# EAGLE board board_2mm_grid (EAGLE 7.2.0)
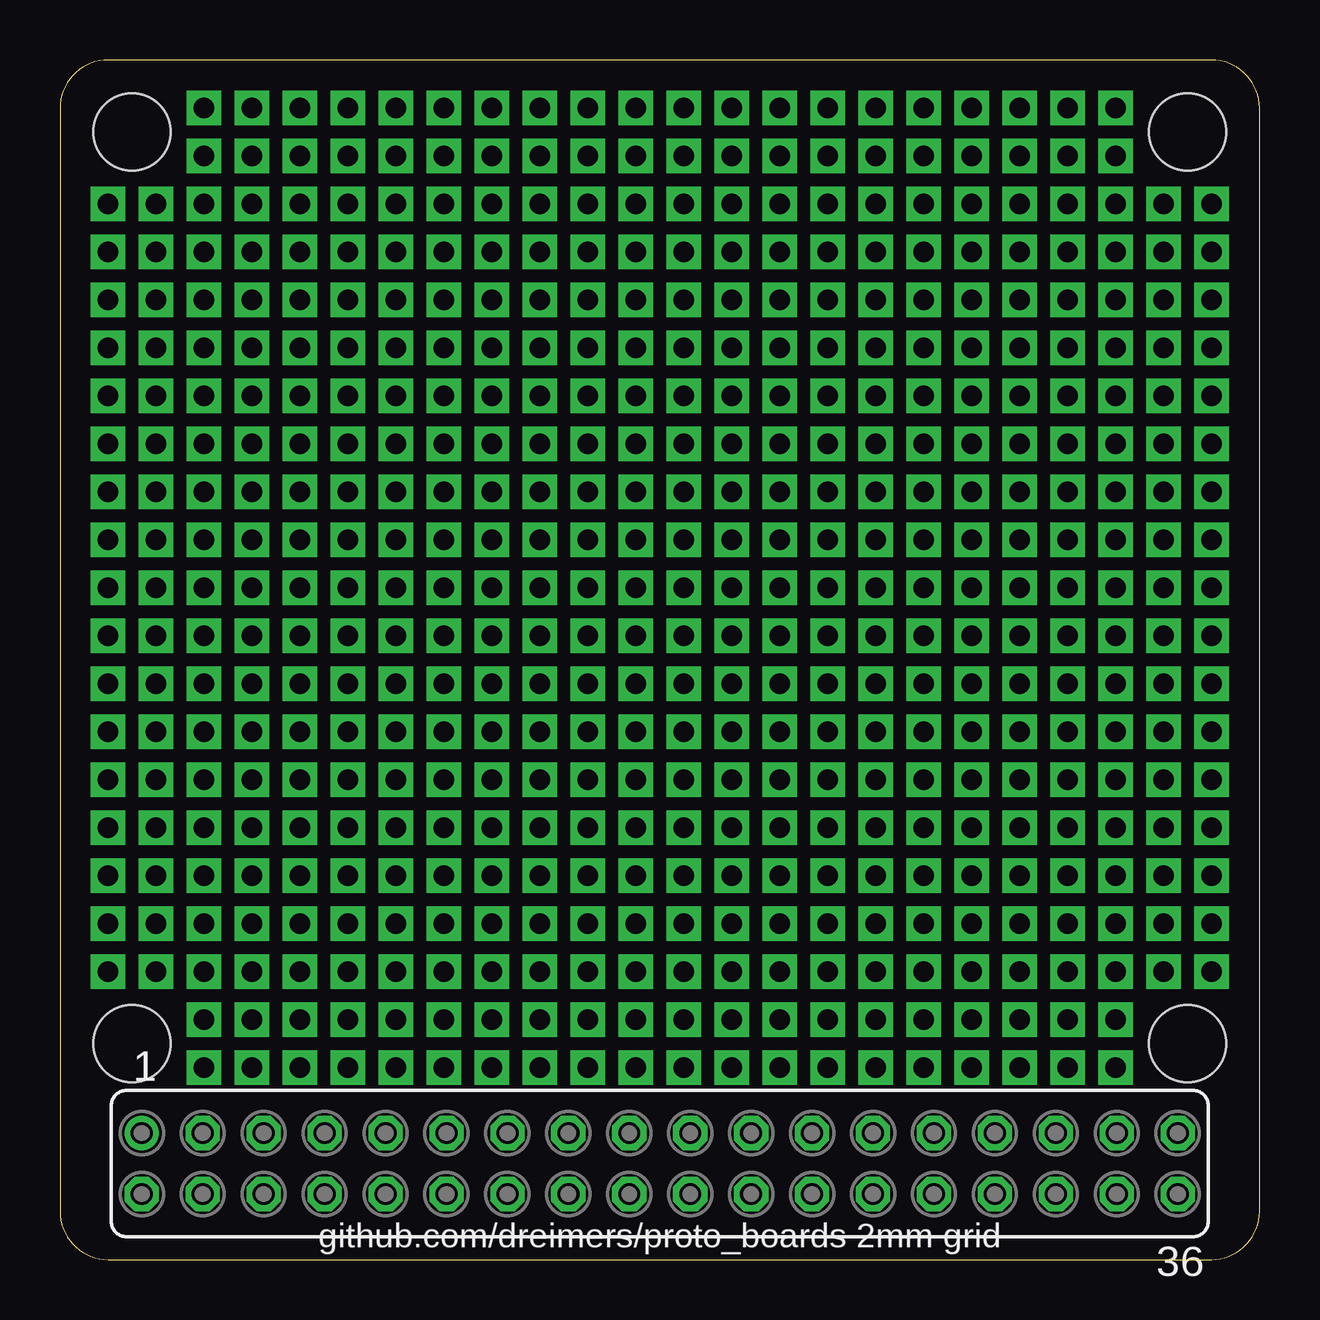
[diagram p0: board, top side]

Size 50 x 50 mm. Coordinates in mm from the lower left corner, seen from the top.
Outline: 0,48 0,2 arc90 2,0 48,0 arc90 50,2 50,48 arc90 48,50 2,50 arc90 0,48
Copper layers (1*16): Top 0.035mm / dielectric 1.5mm / Bottom 0.035mm
Design rules "ITEADstudio_DRC": minimum track width 6mil, minimum drill 12mil, track to track 6mil, track to pad 6mil, pad to pad 6mil, via to via 6mil, smd to smd 0mil, copper to edge 10mil, drill to drill 10mil, minimum pad ring 10mil, minimum via ring 6mil, stop-mask expansion 2mil, vias tented up to drill 100mil, thermal gap 10mil
Holes 3.2 mm at 3,9 47,9 3,47 47,47

## Footprints (pad centres in the part's own frame; a part is rotated, then mirrored left to right if it is on the bottom)
FE18-2 = drill 0.914: 1 -21.59,1.27 | drill 0.914 octagon: 2 -21.59,-1.27; 3 -19.05,1.27; 4 -19.05,-1.27; 5 -16.51,1.27; 6 -16.51,-1.27; 7 -13.97,1.27; 8 -13.97,-1.27; 9 -11.43,1.27; 10 -11.43,-1.27; 11 -8.89,1.27; 12 -8.89,-1.27; 13 -6.35,1.27; 14 -6.35,-1.27; 15 -3.81,1.27; 16 -3.81,-1.27; 17 -1.27,1.27; 18 -1.27,-1.27; 19 1.27,1.27; 20 1.27,-1.27; 21 3.81,1.27; 22 3.81,-1.27; 23 6.35,1.27; 24 6.35,-1.27; 25 8.89,1.27; 26 8.89,-1.27; 27 11.43,1.27; 28 11.43,-1.27; 29 13.97,1.27; 30 13.97,-1.27; 31 16.51,1.27; 32 16.51,-1.27; 33 19.05,1.27; 34 19.05,-1.27; 35 21.59,1.27; 36 21.59,-1.27

## Placement (x,y rotation side)
E$1  [FE18-2]  25,4 0 top

## Library data of the parts
E$1 = con-lsta

## Tracks (layer width: path | path; a pad name or v marks a point on that pad's centre or on a via)
S$3  (via drill 0.85 pad 1.42)
  other vias: 6,8
S$4  (via drill 0.85 pad 1.42)
  other vias: 8,8
S$5  (via drill 0.85 pad 1.42)
  other vias: 10,8
S$6  (via drill 0.85 pad 1.42)
  other vias: 12,8
S$7  (via drill 0.85 pad 1.42)
  other vias: 14,8
S$8  (via drill 0.85 pad 1.42)
  other vias: 16,8
S$9  (via drill 0.85 pad 1.42)
  other vias: 18,8
S$10  (via drill 0.85 pad 1.42)
  other vias: 20,8
S$11  (via drill 0.85 pad 1.42)
  other vias: 22,8
S$12  (via drill 0.85 pad 1.42)
  other vias: 24,8
S$13  (via drill 0.85 pad 1.42)
  other vias: 26,8
S$14  (via drill 0.85 pad 1.42)
  other vias: 28,8
S$15  (via drill 0.85 pad 1.42)
  other vias: 30,8
S$16  (via drill 0.85 pad 1.42)
  other vias: 32,8
S$17  (via drill 0.85 pad 1.42)
  other vias: 34,8
S$18  (via drill 0.85 pad 1.42)
  other vias: 36,8
S$19  (via drill 0.85 pad 1.42)
  other vias: 38,8
S$20  (via drill 0.85 pad 1.42)
  other vias: 40,8
S$21  (via drill 0.85 pad 1.42)
  other vias: 42,8
S$22  (via drill 0.85 pad 1.42)
  other vias: 44,8
S$27  (via drill 0.85 pad 1.42)
  other vias: 6,10
S$28  (via drill 0.85 pad 1.42)
  other vias: 8,10
S$29  (via drill 0.85 pad 1.42)
  other vias: 10,10
S$30  (via drill 0.85 pad 1.42)
  other vias: 12,10
S$31  (via drill 0.85 pad 1.42)
  other vias: 14,10
S$32  (via drill 0.85 pad 1.42)
  other vias: 16,10
S$33  (via drill 0.85 pad 1.42)
  other vias: 18,10
S$34  (via drill 0.85 pad 1.42)
  other vias: 20,10
S$35  (via drill 0.85 pad 1.42)
  other vias: 22,10
S$36  (via drill 0.85 pad 1.42)
  other vias: 24,10
S$37  (via drill 0.85 pad 1.42)
  other vias: 26,10
S$38  (via drill 0.85 pad 1.42)
  other vias: 28,10
S$39  (via drill 0.85 pad 1.42)
  other vias: 30,10
S$40  (via drill 0.85 pad 1.42)
  other vias: 32,10
S$41  (via drill 0.85 pad 1.42)
  other vias: 34,10
S$42  (via drill 0.85 pad 1.42)
  other vias: 36,10
S$43  (via drill 0.85 pad 1.42)
  other vias: 38,10
S$44  (via drill 0.85 pad 1.42)
  other vias: 40,10
S$45  (via drill 0.85 pad 1.42)
  other vias: 42,10
S$46  (via drill 0.85 pad 1.42)
  other vias: 44,10
S$49  (via drill 0.85 pad 1.42)
  other vias: 2,12
S$50  (via drill 0.85 pad 1.42)
  other vias: 4,12
S$51  (via drill 0.85 pad 1.42)
  other vias: 6,12
S$52  (via drill 0.85 pad 1.42)
  other vias: 8,12
S$53  (via drill 0.85 pad 1.42)
  other vias: 10,12
S$54  (via drill 0.85 pad 1.42)
  other vias: 12,12
S$55  (via drill 0.85 pad 1.42)
  other vias: 14,12
S$56  (via drill 0.85 pad 1.42)
  other vias: 16,12
S$57  (via drill 0.85 pad 1.42)
  other vias: 18,12
S$58  (via drill 0.85 pad 1.42)
  other vias: 20,12
S$59  (via drill 0.85 pad 1.42)
  other vias: 22,12
S$60  (via drill 0.85 pad 1.42)
  other vias: 24,12
S$61  (via drill 0.85 pad 1.42)
  other vias: 26,12
S$62  (via drill 0.85 pad 1.42)
  other vias: 28,12
S$63  (via drill 0.85 pad 1.42)
  other vias: 30,12
S$64  (via drill 0.85 pad 1.42)
  other vias: 32,12
S$65  (via drill 0.85 pad 1.42)
  other vias: 34,12
S$66  (via drill 0.85 pad 1.42)
  other vias: 36,12
S$67  (via drill 0.85 pad 1.42)
  other vias: 38,12
S$68  (via drill 0.85 pad 1.42)
  other vias: 40,12
S$69  (via drill 0.85 pad 1.42)
  other vias: 42,12
S$70  (via drill 0.85 pad 1.42)
  other vias: 44,12
S$71  (via drill 0.85 pad 1.42)
  other vias: 46,12
S$72  (via drill 0.85 pad 1.42)
  other vias: 48,12
S$73  (via drill 0.85 pad 1.42)
  other vias: 2,14
S$74  (via drill 0.85 pad 1.42)
  other vias: 4,14
S$75  (via drill 0.85 pad 1.42)
  other vias: 6,14
S$76  (via drill 0.85 pad 1.42)
  other vias: 8,14
S$77  (via drill 0.85 pad 1.42)
  other vias: 10,14
S$78  (via drill 0.85 pad 1.42)
  other vias: 12,14
S$79  (via drill 0.85 pad 1.42)
  other vias: 14,14
S$80  (via drill 0.85 pad 1.42)
  other vias: 16,14
S$81  (via drill 0.85 pad 1.42)
  other vias: 18,14
S$82  (via drill 0.85 pad 1.42)
  other vias: 20,14
S$83  (via drill 0.85 pad 1.42)
  other vias: 22,14
S$84  (via drill 0.85 pad 1.42)
  other vias: 24,14
S$85  (via drill 0.85 pad 1.42)
  other vias: 26,14
S$86  (via drill 0.85 pad 1.42)
  other vias: 28,14
S$87  (via drill 0.85 pad 1.42)
  other vias: 30,14
S$88  (via drill 0.85 pad 1.42)
  other vias: 32,14
S$89  (via drill 0.85 pad 1.42)
  other vias: 34,14
S$90  (via drill 0.85 pad 1.42)
  other vias: 36,14
S$91  (via drill 0.85 pad 1.42)
  other vias: 38,14
S$92  (via drill 0.85 pad 1.42)
  other vias: 40,14
S$93  (via drill 0.85 pad 1.42)
  other vias: 42,14
S$94  (via drill 0.85 pad 1.42)
  other vias: 44,14
S$95  (via drill 0.85 pad 1.42)
  other vias: 46,14
S$96  (via drill 0.85 pad 1.42)
  other vias: 48,14
S$97  (via drill 0.85 pad 1.42)
  other vias: 2,16
S$98  (via drill 0.85 pad 1.42)
  other vias: 4,16
S$99  (via drill 0.85 pad 1.42)
  other vias: 6,16
S$100  (via drill 0.85 pad 1.42)
  other vias: 8,16
S$101  (via drill 0.85 pad 1.42)
  other vias: 10,16
S$102  (via drill 0.85 pad 1.42)
  other vias: 12,16
S$103  (via drill 0.85 pad 1.42)
  other vias: 14,16
S$104  (via drill 0.85 pad 1.42)
  other vias: 16,16
S$105  (via drill 0.85 pad 1.42)
  other vias: 18,16
S$106  (via drill 0.85 pad 1.42)
  other vias: 20,16
S$107  (via drill 0.85 pad 1.42)
  other vias: 22,16
S$108  (via drill 0.85 pad 1.42)
  other vias: 24,16
S$109  (via drill 0.85 pad 1.42)
  other vias: 26,16
S$110  (via drill 0.85 pad 1.42)
  other vias: 28,16
S$111  (via drill 0.85 pad 1.42)
  other vias: 30,16
S$112  (via drill 0.85 pad 1.42)
  other vias: 32,16
S$113  (via drill 0.85 pad 1.42)
  other vias: 34,16
S$114  (via drill 0.85 pad 1.42)
  other vias: 36,16
S$115  (via drill 0.85 pad 1.42)
  other vias: 38,16
S$116  (via drill 0.85 pad 1.42)
  other vias: 40,16
S$117  (via drill 0.85 pad 1.42)
  other vias: 42,16
S$118  (via drill 0.85 pad 1.42)
  other vias: 44,16
S$119  (via drill 0.85 pad 1.42)
  other vias: 46,16
S$120  (via drill 0.85 pad 1.42)
  other vias: 48,16
S$121  (via drill 0.85 pad 1.42)
  other vias: 2,18
S$122  (via drill 0.85 pad 1.42)
  other vias: 4,18
S$123  (via drill 0.85 pad 1.42)
  other vias: 6,18
S$124  (via drill 0.85 pad 1.42)
  other vias: 8,18
S$125  (via drill 0.85 pad 1.42)
  other vias: 10,18
S$126  (via drill 0.85 pad 1.42)
  other vias: 12,18
S$127  (via drill 0.85 pad 1.42)
  other vias: 14,18
S$128  (via drill 0.85 pad 1.42)
  other vias: 16,18
S$129  (via drill 0.85 pad 1.42)
  other vias: 18,18
S$130  (via drill 0.85 pad 1.42)
  other vias: 20,18
S$131  (via drill 0.85 pad 1.42)
  other vias: 22,18
S$132  (via drill 0.85 pad 1.42)
  other vias: 24,18
S$133  (via drill 0.85 pad 1.42)
  other vias: 26,18
S$134  (via drill 0.85 pad 1.42)
  other vias: 28,18
S$135  (via drill 0.85 pad 1.42)
  other vias: 30,18
S$136  (via drill 0.85 pad 1.42)
  other vias: 32,18
S$137  (via drill 0.85 pad 1.42)
  other vias: 34,18
S$138  (via drill 0.85 pad 1.42)
  other vias: 36,18
S$139  (via drill 0.85 pad 1.42)
  other vias: 38,18
S$140  (via drill 0.85 pad 1.42)
  other vias: 40,18
S$141  (via drill 0.85 pad 1.42)
  other vias: 42,18
S$142  (via drill 0.85 pad 1.42)
  other vias: 44,18
S$143  (via drill 0.85 pad 1.42)
  other vias: 46,18
S$144  (via drill 0.85 pad 1.42)
  other vias: 48,18
S$145  (via drill 0.85 pad 1.42)
  other vias: 2,20
S$146  (via drill 0.85 pad 1.42)
  other vias: 4,20
S$147  (via drill 0.85 pad 1.42)
  other vias: 6,20
S$148  (via drill 0.85 pad 1.42)
  other vias: 8,20
S$149  (via drill 0.85 pad 1.42)
  other vias: 10,20
S$150  (via drill 0.85 pad 1.42)
  other vias: 12,20
S$151  (via drill 0.85 pad 1.42)
  other vias: 14,20
S$152  (via drill 0.85 pad 1.42)
  other vias: 16,20
S$153  (via drill 0.85 pad 1.42)
  other vias: 18,20
S$154  (via drill 0.85 pad 1.42)
  other vias: 20,20
S$155  (via drill 0.85 pad 1.42)
  other vias: 22,20
S$156  (via drill 0.85 pad 1.42)
  other vias: 24,20
S$157  (via drill 0.85 pad 1.42)
  other vias: 26,20
S$158  (via drill 0.85 pad 1.42)
  other vias: 28,20
S$159  (via drill 0.85 pad 1.42)
  other vias: 30,20
S$160  (via drill 0.85 pad 1.42)
  other vias: 32,20
S$161  (via drill 0.85 pad 1.42)
  other vias: 34,20
S$162  (via drill 0.85 pad 1.42)
  other vias: 36,20
S$163  (via drill 0.85 pad 1.42)
  other vias: 38,20
S$164  (via drill 0.85 pad 1.42)
  other vias: 40,20
S$165  (via drill 0.85 pad 1.42)
  other vias: 42,20
S$166  (via drill 0.85 pad 1.42)
  other vias: 44,20
S$167  (via drill 0.85 pad 1.42)
  other vias: 46,20
S$168  (via drill 0.85 pad 1.42)
  other vias: 48,20
S$169  (via drill 0.85 pad 1.42)
  other vias: 2,22
S$170  (via drill 0.85 pad 1.42)
  other vias: 4,22
S$171  (via drill 0.85 pad 1.42)
  other vias: 6,22
S$172  (via drill 0.85 pad 1.42)
  other vias: 8,22
S$173  (via drill 0.85 pad 1.42)
  other vias: 10,22
S$174  (via drill 0.85 pad 1.42)
  other vias: 12,22
S$175  (via drill 0.85 pad 1.42)
  other vias: 14,22
S$176  (via drill 0.85 pad 1.42)
  other vias: 16,22
S$177  (via drill 0.85 pad 1.42)
  other vias: 18,22
S$178  (via drill 0.85 pad 1.42)
  other vias: 20,22
S$179  (via drill 0.85 pad 1.42)
  other vias: 22,22
S$180  (via drill 0.85 pad 1.42)
  other vias: 24,22
S$181  (via drill 0.85 pad 1.42)
  other vias: 26,22
S$182  (via drill 0.85 pad 1.42)
  other vias: 28,22
S$183  (via drill 0.85 pad 1.42)
  other vias: 30,22
S$184  (via drill 0.85 pad 1.42)
  other vias: 32,22
S$185  (via drill 0.85 pad 1.42)
  other vias: 34,22
S$186  (via drill 0.85 pad 1.42)
  other vias: 36,22
S$187  (via drill 0.85 pad 1.42)
  other vias: 38,22
S$188  (via drill 0.85 pad 1.42)
  other vias: 40,22
S$189  (via drill 0.85 pad 1.42)
  other vias: 42,22
S$190  (via drill 0.85 pad 1.42)
  other vias: 44,22
S$191  (via drill 0.85 pad 1.42)
  other vias: 46,22
S$192  (via drill 0.85 pad 1.42)
  other vias: 48,22
S$193  (via drill 0.85 pad 1.42)
  other vias: 2,24
S$194  (via drill 0.85 pad 1.42)
  other vias: 4,24
S$195  (via drill 0.85 pad 1.42)
  other vias: 6,24
S$196  (via drill 0.85 pad 1.42)
  other vias: 8,24
S$197  (via drill 0.85 pad 1.42)
  other vias: 10,24
S$198  (via drill 0.85 pad 1.42)
  other vias: 12,24
S$199  (via drill 0.85 pad 1.42)
  other vias: 14,24
S$200  (via drill 0.85 pad 1.42)
  other vias: 16,24
S$201  (via drill 0.85 pad 1.42)
  other vias: 18,24
S$202  (via drill 0.85 pad 1.42)
  other vias: 20,24
S$203  (via drill 0.85 pad 1.42)
  other vias: 22,24
S$204  (via drill 0.85 pad 1.42)
  other vias: 24,24
S$205  (via drill 0.85 pad 1.42)
  other vias: 26,24
S$206  (via drill 0.85 pad 1.42)
  other vias: 28,24
S$207  (via drill 0.85 pad 1.42)
  other vias: 30,24
S$208  (via drill 0.85 pad 1.42)
  other vias: 32,24
S$209  (via drill 0.85 pad 1.42)
  other vias: 34,24
S$210  (via drill 0.85 pad 1.42)
  other vias: 36,24
S$211  (via drill 0.85 pad 1.42)
  other vias: 38,24
S$212  (via drill 0.85 pad 1.42)
  other vias: 40,24
S$213  (via drill 0.85 pad 1.42)
  other vias: 42,24
S$214  (via drill 0.85 pad 1.42)
  other vias: 44,24
S$215  (via drill 0.85 pad 1.42)
  other vias: 46,24
S$216  (via drill 0.85 pad 1.42)
  other vias: 48,24
S$217  (via drill 0.85 pad 1.42)
  other vias: 2,26
S$218  (via drill 0.85 pad 1.42)
  other vias: 4,26
S$219  (via drill 0.85 pad 1.42)
  other vias: 6,26
S$220  (via drill 0.85 pad 1.42)
  other vias: 8,26
S$221  (via drill 0.85 pad 1.42)
  other vias: 10,26
S$222  (via drill 0.85 pad 1.42)
  other vias: 12,26
S$223  (via drill 0.85 pad 1.42)
  other vias: 14,26
S$224  (via drill 0.85 pad 1.42)
  other vias: 16,26
S$225  (via drill 0.85 pad 1.42)
  other vias: 18,26
S$226  (via drill 0.85 pad 1.42)
  other vias: 20,26
S$227  (via drill 0.85 pad 1.42)
  other vias: 22,26
S$228  (via drill 0.85 pad 1.42)
  other vias: 24,26
S$229  (via drill 0.85 pad 1.42)
  other vias: 26,26
S$230  (via drill 0.85 pad 1.42)
  other vias: 28,26
S$231  (via drill 0.85 pad 1.42)
  other vias: 30,26
S$232  (via drill 0.85 pad 1.42)
  other vias: 32,26
S$233  (via drill 0.85 pad 1.42)
  other vias: 34,26
S$234  (via drill 0.85 pad 1.42)
  other vias: 36,26
S$235  (via drill 0.85 pad 1.42)
  other vias: 38,26
S$236  (via drill 0.85 pad 1.42)
  other vias: 40,26
S$237  (via drill 0.85 pad 1.42)
  other vias: 42,26
S$238  (via drill 0.85 pad 1.42)
  other vias: 44,26
S$239  (via drill 0.85 pad 1.42)
  other vias: 46,26
S$240  (via drill 0.85 pad 1.42)
  other vias: 48,26
S$241  (via drill 0.85 pad 1.42)
  other vias: 2,28
S$242  (via drill 0.85 pad 1.42)
  other vias: 4,28
S$243  (via drill 0.85 pad 1.42)
  other vias: 6,28
S$244  (via drill 0.85 pad 1.42)
  other vias: 8,28
S$245  (via drill 0.85 pad 1.42)
  other vias: 10,28
S$246  (via drill 0.85 pad 1.42)
  other vias: 12,28
S$247  (via drill 0.85 pad 1.42)
  other vias: 14,28
S$248  (via drill 0.85 pad 1.42)
  other vias: 16,28
S$249  (via drill 0.85 pad 1.42)
  other vias: 18,28
S$250  (via drill 0.85 pad 1.42)
  other vias: 20,28
S$251  (via drill 0.85 pad 1.42)
  other vias: 22,28
S$252  (via drill 0.85 pad 1.42)
  other vias: 24,28
S$253  (via drill 0.85 pad 1.42)
  other vias: 26,28
S$254  (via drill 0.85 pad 1.42)
  other vias: 28,28
S$255  (via drill 0.85 pad 1.42)
  other vias: 30,28
S$256  (via drill 0.85 pad 1.42)
  other vias: 32,28
S$257  (via drill 0.85 pad 1.42)
  other vias: 34,28
S$258  (via drill 0.85 pad 1.42)
  other vias: 36,28
S$259  (via drill 0.85 pad 1.42)
  other vias: 38,28
S$260  (via drill 0.85 pad 1.42)
  other vias: 40,28
S$261  (via drill 0.85 pad 1.42)
  other vias: 42,28
S$262  (via drill 0.85 pad 1.42)
  other vias: 44,28
S$263  (via drill 0.85 pad 1.42)
  other vias: 46,28
S$264  (via drill 0.85 pad 1.42)
  other vias: 48,28
S$265  (via drill 0.85 pad 1.42)
  other vias: 2,30
S$266  (via drill 0.85 pad 1.42)
  other vias: 4,30
S$267  (via drill 0.85 pad 1.42)
  other vias: 6,30
S$268  (via drill 0.85 pad 1.42)
  other vias: 8,30
S$269  (via drill 0.85 pad 1.42)
  other vias: 10,30
S$270  (via drill 0.85 pad 1.42)
  other vias: 12,30
S$271  (via drill 0.85 pad 1.42)
  other vias: 14,30
S$272  (via drill 0.85 pad 1.42)
  other vias: 16,30
S$273  (via drill 0.85 pad 1.42)
  other vias: 18,30
S$274  (via drill 0.85 pad 1.42)
  other vias: 20,30
S$275  (via drill 0.85 pad 1.42)
  other vias: 22,30
S$276  (via drill 0.85 pad 1.42)
  other vias: 24,30
S$277  (via drill 0.85 pad 1.42)
  other vias: 26,30
S$278  (via drill 0.85 pad 1.42)
  other vias: 28,30
S$279  (via drill 0.85 pad 1.42)
  other vias: 30,30
S$280  (via drill 0.85 pad 1.42)
  other vias: 32,30
S$281  (via drill 0.85 pad 1.42)
  other vias: 34,30
S$282  (via drill 0.85 pad 1.42)
  other vias: 36,30
S$283  (via drill 0.85 pad 1.42)
  other vias: 38,30
S$284  (via drill 0.85 pad 1.42)
  other vias: 40,30
S$285  (via drill 0.85 pad 1.42)
  other vias: 42,30
S$286  (via drill 0.85 pad 1.42)
  other vias: 44,30
S$287  (via drill 0.85 pad 1.42)
  other vias: 46,30
S$288  (via drill 0.85 pad 1.42)
  other vias: 48,30
S$289  (via drill 0.85 pad 1.42)
  other vias: 2,32
S$290  (via drill 0.85 pad 1.42)
  other vias: 4,32
S$291  (via drill 0.85 pad 1.42)
  other vias: 6,32
S$292  (via drill 0.85 pad 1.42)
  other vias: 8,32
S$293  (via drill 0.85 pad 1.42)
  other vias: 10,32
S$294  (via drill 0.85 pad 1.42)
  other vias: 12,32
S$295  (via drill 0.85 pad 1.42)
  other vias: 14,32
S$296  (via drill 0.85 pad 1.42)
  other vias: 16,32
S$297  (via drill 0.85 pad 1.42)
  other vias: 18,32
S$298  (via drill 0.85 pad 1.42)
  other vias: 20,32
S$299  (via drill 0.85 pad 1.42)
  other vias: 22,32
S$300  (via drill 0.85 pad 1.42)
  other vias: 24,32
S$301  (via drill 0.85 pad 1.42)
  other vias: 26,32
S$302  (via drill 0.85 pad 1.42)
  other vias: 28,32
S$303  (via drill 0.85 pad 1.42)
  other vias: 30,32
S$304  (via drill 0.85 pad 1.42)
  other vias: 32,32
S$305  (via drill 0.85 pad 1.42)
  other vias: 34,32
S$306  (via drill 0.85 pad 1.42)
  other vias: 36,32
S$307  (via drill 0.85 pad 1.42)
  other vias: 38,32
S$308  (via drill 0.85 pad 1.42)
  other vias: 40,32
S$309  (via drill 0.85 pad 1.42)
  other vias: 42,32
S$310  (via drill 0.85 pad 1.42)
  other vias: 44,32
S$311  (via drill 0.85 pad 1.42)
  other vias: 46,32
S$312  (via drill 0.85 pad 1.42)
  other vias: 48,32
S$313  (via drill 0.85 pad 1.42)
  other vias: 2,34
S$314  (via drill 0.85 pad 1.42)
  other vias: 4,34
S$315  (via drill 0.85 pad 1.42)
  other vias: 6,34
S$316  (via drill 0.85 pad 1.42)
  other vias: 8,34
S$317  (via drill 0.85 pad 1.42)
  other vias: 10,34
S$318  (via drill 0.85 pad 1.42)
  other vias: 12,34
S$319  (via drill 0.85 pad 1.42)
  other vias: 14,34
S$320  (via drill 0.85 pad 1.42)
  other vias: 16,34
S$321  (via drill 0.85 pad 1.42)
  other vias: 18,34
S$322  (via drill 0.85 pad 1.42)
  other vias: 20,34
S$323  (via drill 0.85 pad 1.42)
  other vias: 22,34
S$324  (via drill 0.85 pad 1.42)
  other vias: 24,34
S$325  (via drill 0.85 pad 1.42)
  other vias: 26,34
S$326  (via drill 0.85 pad 1.42)
  other vias: 28,34
S$327  (via drill 0.85 pad 1.42)
  other vias: 30,34
S$328  (via drill 0.85 pad 1.42)
  other vias: 32,34
S$329  (via drill 0.85 pad 1.42)
  other vias: 34,34
S$330  (via drill 0.85 pad 1.42)
  other vias: 36,34
S$331  (via drill 0.85 pad 1.42)
  other vias: 38,34
S$332  (via drill 0.85 pad 1.42)
  other vias: 40,34
S$333  (via drill 0.85 pad 1.42)
  other vias: 42,34
S$334  (via drill 0.85 pad 1.42)
  other vias: 44,34
S$335  (via drill 0.85 pad 1.42)
  other vias: 46,34
S$336  (via drill 0.85 pad 1.42)
  other vias: 48,34
S$337  (via drill 0.85 pad 1.42)
  other vias: 2,36
S$338  (via drill 0.85 pad 1.42)
  other vias: 4,36
S$339  (via drill 0.85 pad 1.42)
  other vias: 6,36
S$340  (via drill 0.85 pad 1.42)
  other vias: 8,36
S$341  (via drill 0.85 pad 1.42)
  other vias: 10,36
S$342  (via drill 0.85 pad 1.42)
  other vias: 12,36
S$343  (via drill 0.85 pad 1.42)
  other vias: 14,36
S$344  (via drill 0.85 pad 1.42)
  other vias: 16,36
S$345  (via drill 0.85 pad 1.42)
  other vias: 18,36
S$346  (via drill 0.85 pad 1.42)
  other vias: 20,36
S$347  (via drill 0.85 pad 1.42)
  other vias: 22,36
S$348  (via drill 0.85 pad 1.42)
  other vias: 24,36
S$349  (via drill 0.85 pad 1.42)
  other vias: 26,36
S$350  (via drill 0.85 pad 1.42)
  other vias: 28,36
S$351  (via drill 0.85 pad 1.42)
  other vias: 30,36
S$352  (via drill 0.85 pad 1.42)
  other vias: 32,36
S$353  (via drill 0.85 pad 1.42)
  other vias: 34,36
S$354  (via drill 0.85 pad 1.42)
  other vias: 36,36
S$355  (via drill 0.85 pad 1.42)
  other vias: 38,36
S$356  (via drill 0.85 pad 1.42)
  other vias: 40,36
S$357  (via drill 0.85 pad 1.42)
  other vias: 42,36
S$358  (via drill 0.85 pad 1.42)
  other vias: 44,36
S$359  (via drill 0.85 pad 1.42)
  other vias: 46,36
S$360  (via drill 0.85 pad 1.42)
  other vias: 48,36
S$361  (via drill 0.85 pad 1.42)
  other vias: 2,38
S$362  (via drill 0.85 pad 1.42)
  other vias: 4,38
S$363  (via drill 0.85 pad 1.42)
  other vias: 6,38
S$364  (via drill 0.85 pad 1.42)
  other vias: 8,38
S$365  (via drill 0.85 pad 1.42)
  other vias: 10,38
S$366  (via drill 0.85 pad 1.42)
  other vias: 12,38
S$367  (via drill 0.85 pad 1.42)
  other vias: 14,38
S$368  (via drill 0.85 pad 1.42)
  other vias: 16,38
S$369  (via drill 0.85 pad 1.42)
  other vias: 18,38
S$370  (via drill 0.85 pad 1.42)
  other vias: 20,38
S$371  (via drill 0.85 pad 1.42)
  other vias: 22,38
S$372  (via drill 0.85 pad 1.42)
  other vias: 24,38
S$373  (via drill 0.85 pad 1.42)
  other vias: 26,38
S$374  (via drill 0.85 pad 1.42)
  other vias: 28,38
S$375  (via drill 0.85 pad 1.42)
  other vias: 30,38
S$376  (via drill 0.85 pad 1.42)
  other vias: 32,38
S$377  (via drill 0.85 pad 1.42)
  other vias: 34,38
S$378  (via drill 0.85 pad 1.42)
  other vias: 36,38
S$379  (via drill 0.85 pad 1.42)
  other vias: 38,38
S$380  (via drill 0.85 pad 1.42)
  other vias: 40,38
S$381  (via drill 0.85 pad 1.42)
  other vias: 42,38
S$382  (via drill 0.85 pad 1.42)
  other vias: 44,38
S$383  (via drill 0.85 pad 1.42)
  other vias: 46,38
S$384  (via drill 0.85 pad 1.42)
  other vias: 48,38
S$385  (via drill 0.85 pad 1.42)
  other vias: 2,40
S$386  (via drill 0.85 pad 1.42)
  other vias: 4,40
S$387  (via drill 0.85 pad 1.42)
  other vias: 6,40
S$388  (via drill 0.85 pad 1.42)
  other vias: 8,40
S$389  (via drill 0.85 pad 1.42)
  other vias: 10,40
S$390  (via drill 0.85 pad 1.42)
  other vias: 12,40
S$391  (via drill 0.85 pad 1.42)
  other vias: 14,40
S$392  (via drill 0.85 pad 1.42)
  other vias: 16,40
S$393  (via drill 0.85 pad 1.42)
  other vias: 18,40
S$394  (via drill 0.85 pad 1.42)
  other vias: 20,40
S$395  (via drill 0.85 pad 1.42)
  other vias: 22,40
S$396  (via drill 0.85 pad 1.42)
  other vias: 24,40
S$397  (via drill 0.85 pad 1.42)
  other vias: 26,40
S$398  (via drill 0.85 pad 1.42)
  other vias: 28,40
S$399  (via drill 0.85 pad 1.42)
  other vias: 30,40
S$400  (via drill 0.85 pad 1.42)
  other vias: 32,40
S$401  (via drill 0.85 pad 1.42)
  other vias: 34,40
S$402  (via drill 0.85 pad 1.42)
  other vias: 36,40
S$403  (via drill 0.85 pad 1.42)
  other vias: 38,40
S$404  (via drill 0.85 pad 1.42)
  other vias: 40,40
S$405  (via drill 0.85 pad 1.42)
  other vias: 42,40
S$406  (via drill 0.85 pad 1.42)
  other vias: 44,40
S$407  (via drill 0.85 pad 1.42)
  other vias: 46,40
S$408  (via drill 0.85 pad 1.42)
  other vias: 48,40
S$409  (via drill 0.85 pad 1.42)
  other vias: 2,42
S$410  (via drill 0.85 pad 1.42)
  other vias: 4,42
S$411  (via drill 0.85 pad 1.42)
  other vias: 6,42
S$412  (via drill 0.85 pad 1.42)
  other vias: 8,42
S$413  (via drill 0.85 pad 1.42)
  other vias: 10,42
S$414  (via drill 0.85 pad 1.42)
  other vias: 12,42
S$415  (via drill 0.85 pad 1.42)
  other vias: 14,42
S$416  (via drill 0.85 pad 1.42)
  other vias: 16,42
S$417  (via drill 0.85 pad 1.42)
  other vias: 18,42
S$418  (via drill 0.85 pad 1.42)
  other vias: 20,42
S$419  (via drill 0.85 pad 1.42)
  other vias: 22,42
S$420  (via drill 0.85 pad 1.42)
  other vias: 24,42
S$421  (via drill 0.85 pad 1.42)
  other vias: 26,42
S$422  (via drill 0.85 pad 1.42)
  other vias: 28,42
S$423  (via drill 0.85 pad 1.42)
  other vias: 30,42
S$424  (via drill 0.85 pad 1.42)
  other vias: 32,42
S$425  (via drill 0.85 pad 1.42)
  other vias: 34,42
S$426  (via drill 0.85 pad 1.42)
  other vias: 36,42
S$427  (via drill 0.85 pad 1.42)
  other vias: 38,42
S$428  (via drill 0.85 pad 1.42)
  other vias: 40,42
S$429  (via drill 0.85 pad 1.42)
  other vias: 42,42
S$430  (via drill 0.85 pad 1.42)
  other vias: 44,42
S$431  (via drill 0.85 pad 1.42)
  other vias: 46,42
S$432  (via drill 0.85 pad 1.42)
  other vias: 48,42
S$433  (via drill 0.85 pad 1.42)
  other vias: 2,44
S$434  (via drill 0.85 pad 1.42)
  other vias: 4,44
S$435  (via drill 0.85 pad 1.42)
  other vias: 6,44
S$436  (via drill 0.85 pad 1.42)
  other vias: 8,44
S$437  (via drill 0.85 pad 1.42)
  other vias: 10,44
S$438  (via drill 0.85 pad 1.42)
  other vias: 12,44
S$439  (via drill 0.85 pad 1.42)
  other vias: 14,44
S$440  (via drill 0.85 pad 1.42)
  other vias: 16,44
S$441  (via drill 0.85 pad 1.42)
  other vias: 18,44
S$442  (via drill 0.85 pad 1.42)
  other vias: 20,44
S$443  (via drill 0.85 pad 1.42)
  other vias: 22,44
S$444  (via drill 0.85 pad 1.42)
  other vias: 24,44
S$445  (via drill 0.85 pad 1.42)
  other vias: 26,44
S$446  (via drill 0.85 pad 1.42)
  other vias: 28,44
S$447  (via drill 0.85 pad 1.42)
  other vias: 30,44
S$448  (via drill 0.85 pad 1.42)
  other vias: 32,44
S$449  (via drill 0.85 pad 1.42)
  other vias: 34,44
S$450  (via drill 0.85 pad 1.42)
  other vias: 36,44
S$451  (via drill 0.85 pad 1.42)
  other vias: 38,44
S$452  (via drill 0.85 pad 1.42)
  other vias: 40,44
S$453  (via drill 0.85 pad 1.42)
  other vias: 42,44
S$454  (via drill 0.85 pad 1.42)
  other vias: 44,44
S$455  (via drill 0.85 pad 1.42)
  other vias: 46,44
S$456  (via drill 0.85 pad 1.42)
  other vias: 48,44
S$459  (via drill 0.85 pad 1.42)
  other vias: 6,46
S$460  (via drill 0.85 pad 1.42)
  other vias: 8,46
S$461  (via drill 0.85 pad 1.42)
  other vias: 10,46
S$462  (via drill 0.85 pad 1.42)
  other vias: 12,46
S$463  (via drill 0.85 pad 1.42)
  other vias: 14,46
S$464  (via drill 0.85 pad 1.42)
  other vias: 16,46
S$465  (via drill 0.85 pad 1.42)
  other vias: 18,46
S$466  (via drill 0.85 pad 1.42)
  other vias: 20,46
S$467  (via drill 0.85 pad 1.42)
  other vias: 22,46
S$468  (via drill 0.85 pad 1.42)
  other vias: 24,46
S$469  (via drill 0.85 pad 1.42)
  other vias: 26,46
S$470  (via drill 0.85 pad 1.42)
  other vias: 28,46
S$471  (via drill 0.85 pad 1.42)
  other vias: 30,46
S$472  (via drill 0.85 pad 1.42)
  other vias: 32,46
S$473  (via drill 0.85 pad 1.42)
  other vias: 34,46
S$474  (via drill 0.85 pad 1.42)
  other vias: 36,46
S$475  (via drill 0.85 pad 1.42)
  other vias: 38,46
S$476  (via drill 0.85 pad 1.42)
  other vias: 40,46
S$477  (via drill 0.85 pad 1.42)
  other vias: 42,46
S$478  (via drill 0.85 pad 1.42)
  other vias: 44,46
S$483  (via drill 0.85 pad 1.42)
  other vias: 6,48
S$484  (via drill 0.85 pad 1.42)
  other vias: 8,48
S$485  (via drill 0.85 pad 1.42)
  other vias: 10,48
S$486  (via drill 0.85 pad 1.42)
  other vias: 12,48
S$487  (via drill 0.85 pad 1.42)
  other vias: 14,48
S$488  (via drill 0.85 pad 1.42)
  other vias: 16,48
S$489  (via drill 0.85 pad 1.42)
  other vias: 18,48
S$490  (via drill 0.85 pad 1.42)
  other vias: 20,48
S$491  (via drill 0.85 pad 1.42)
  other vias: 22,48
S$492  (via drill 0.85 pad 1.42)
  other vias: 24,48
S$493  (via drill 0.85 pad 1.42)
  other vias: 26,48
S$494  (via drill 0.85 pad 1.42)
  other vias: 28,48
S$495  (via drill 0.85 pad 1.42)
  other vias: 30,48
S$496  (via drill 0.85 pad 1.42)
  other vias: 32,48
S$497  (via drill 0.85 pad 1.42)
  other vias: 34,48
S$498  (via drill 0.85 pad 1.42)
  other vias: 36,48
S$499  (via drill 0.85 pad 1.42)
  other vias: 38,48
S$500  (via drill 0.85 pad 1.42)
  other vias: 40,48
S$501  (via drill 0.85 pad 1.42)
  other vias: 42,48
S$502  (via drill 0.85 pad 1.42)
  other vias: 44,48

## Text on the board
tNames: github.com/dreimers/proto_boards 2mm grid